# Altium PCB Screen.PcbDoc
Units mm, origin at the board's own origin, x right, y up, seen from the top; angles counter-clockwise.
Board outline 132.7 x 75.8 mm, 2 copper layers (Top Layer, Bottom Layer), stack 1.671 mm thick; 1 components, 0 nets, 46 pads, 0 vias.
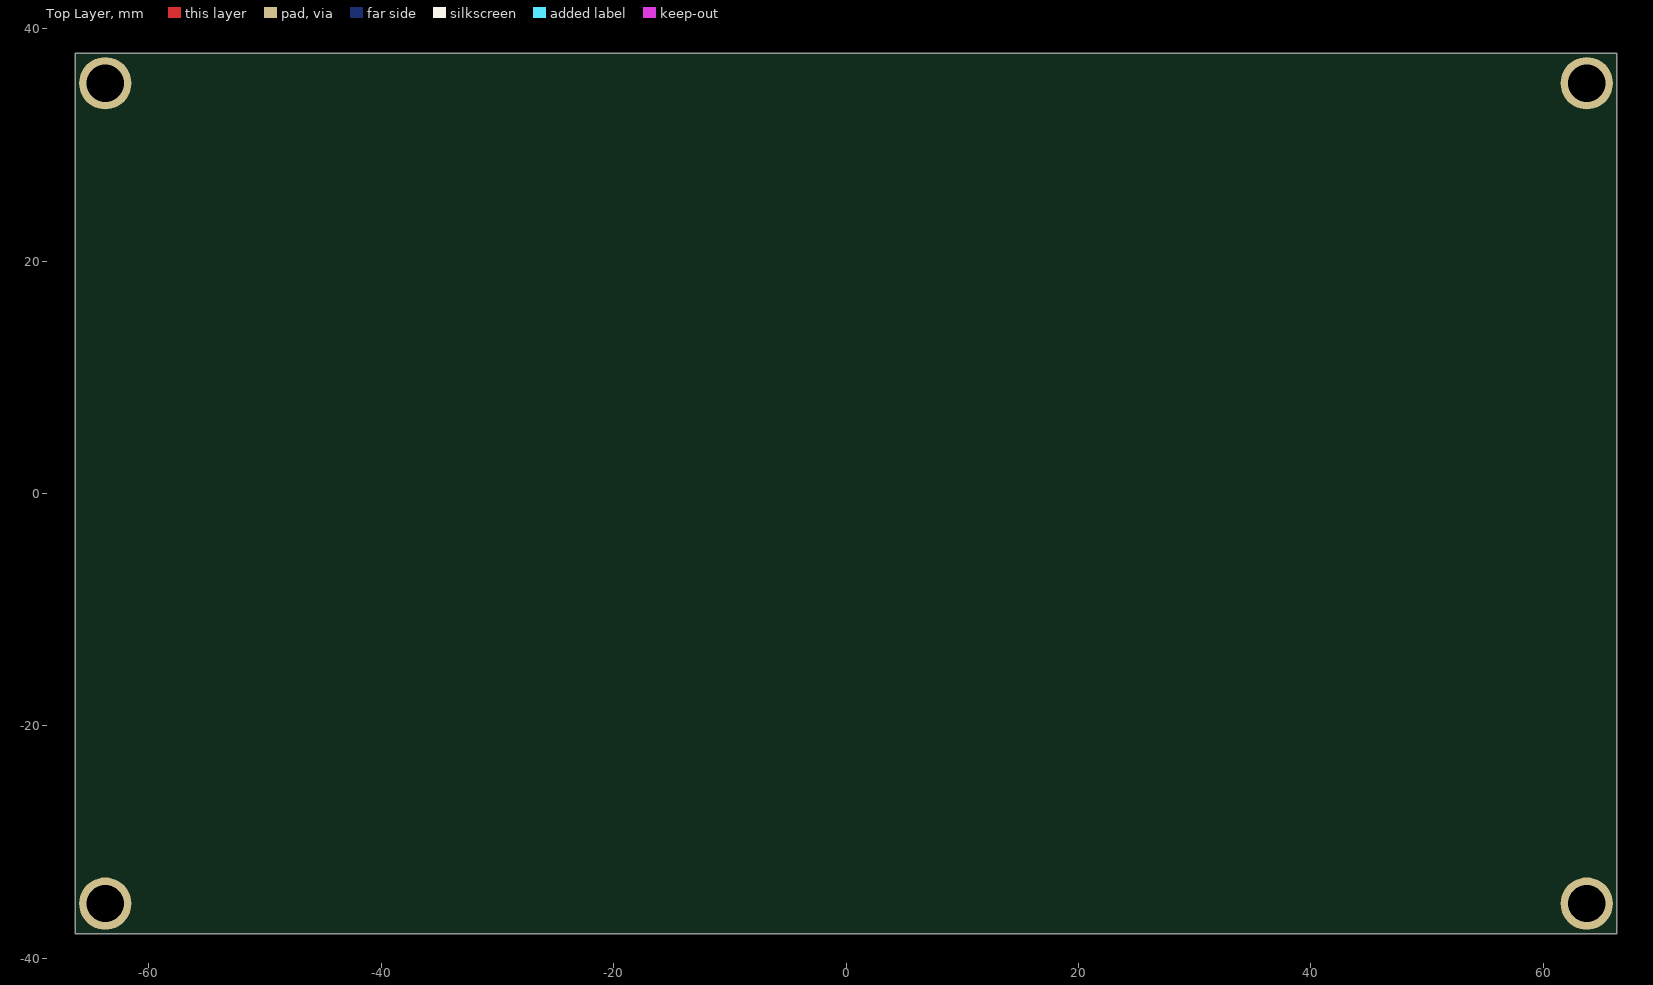
[diagram p0: Top Layer view]
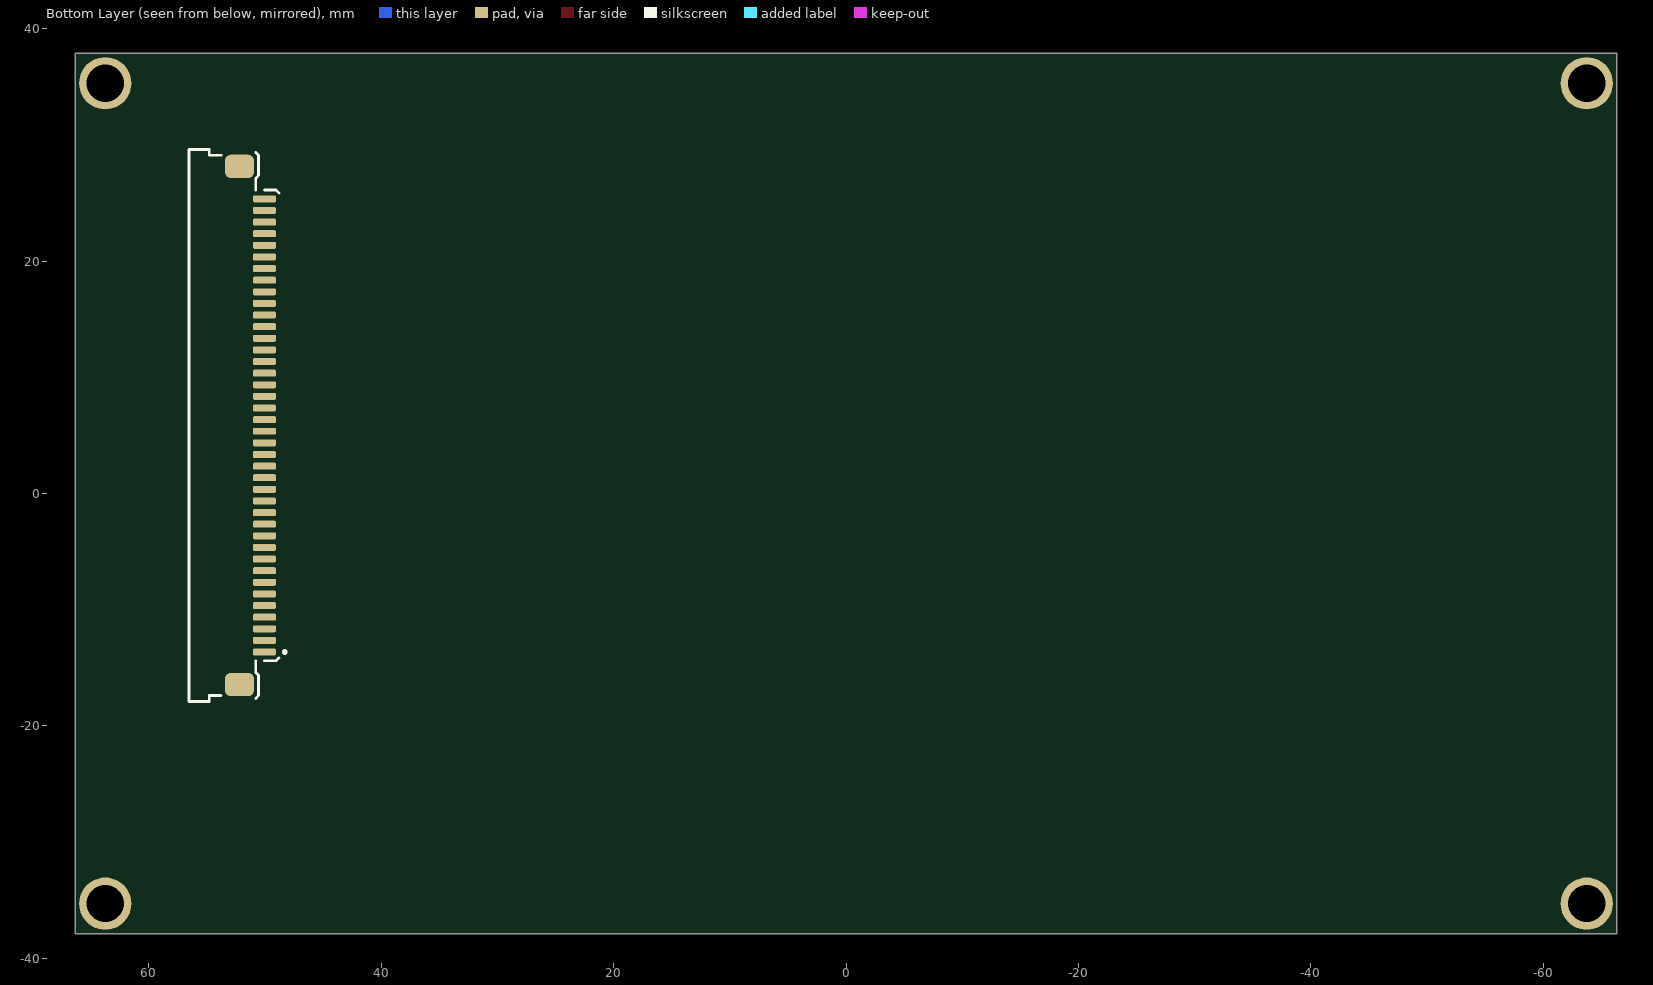
[diagram p1: Bottom Layer view, seen from below]

## Layer stack, top to bottom
Top Solder: solder mask 0.0102, Solder Resist, Dk 3.5
Top Layer: signal copper 0.0356
Dielectric 1: dielectric 1.6, FR-4, Dk 4.8
Bottom Layer: signal copper 0.0356
Bottom Solder: solder mask 0.0102, Solder Resist, Dk 3.5

## Board outline
-66.35,-37.9 66.35,-37.9 66.35,37.9 -66.35,37.9

## Design rules (kind name [scope] priority, off if disabled: settings)
Clearance [All] p1: gap=0.254
ComponentClearance [All] p1: gap=0 collisioncheckmode=3 verticalgap=0 showdistances=FALSE
PolygonConnect [All] p1: connectstyle=Relief reliefconductorwidth=0.254 reliefentries=4 polygonreliefangle="90 Angle" airgapwidth=0.254
RoutingVias [All] p1: holewidth=0.711 width=1.27 viastyle="Through Hole" minholewidth=0.711 minwidth=1.27 maxholewidth=0.711 maxwidth=1.27
SolderMaskExpansion [All] p1: expansion=0.102
Width [All] p1: maxlimit=0.254 minlimit=0.254 preferedwidth=0.254
29 further rules are at their usual default settings.

## Components (designator, comment, footprint, x,y, rotation, side; value= is the part's Value field where it differs from the comment)
? "" ER-CON40HB-2 56.35,5.85 r90 bottom

## Footprints (in the part's own frame and the unit in brackets; to place one, negate y for a bottom-side part, rotate by r counter-clockwise, add the part's x,y. Pads: shape width x height; smd on the part's side, far side on the other; paste and mask are expansions set on the pad)
ER-CON40HB-2 [mm] "Conn - FFC/FPC, 40 Pin, 1.0mm Pitch, ZIF"
  rrect50% 0.6x2 smd: 1(-19.5,-6.3) 2(-18.5,-6.3) 3(-17.5,-6.3) 4(-16.5,-6.3) 5(-15.5,-6.3) 6(-14.5,-6.3) 7(-13.5,-6.3) 8(-12.5,-6.3) 9(-11.5,-6.3) 10(-10.5,-6.3) 11(-9.5,-6.3) 12(-8.5,-6.3) 13(-7.5,-6.3) 14(-6.5,-6.3) 15(-5.5,-6.3) 16(-4.5,-6.3) 17(-3.5,-6.3) 18(-2.5,-6.3) 19(-1.5,-6.3) 20(-0.5,-6.3) 21(0.5,-6.3) 22(1.5,-6.3) 23(2.5,-6.3) 24(3.5,-6.3) 25(4.5,-6.3) 26(5.5,-6.3) 27(6.5,-6.3) 28(7.5,-6.3) 29(8.5,-6.3) 30(9.5,-6.3) 31(10.5,-6.3) 32(11.5,-6.3) 33(12.5,-6.3) 34(13.5,-6.3) 35(14.5,-6.3) 36(15.5,-6.3) 37(16.5,-6.3) 38(17.5,-6.3) 39(18.5,-6.3) 40(19.5,-6.3)
  rrect50% 2x2.5 smd: ""(-22.3,-4.15) ""(22.3,-4.15)
  silkscreen extent -23.75,-8.17 23.75,0.2, body extent -23.5,-6.8 23.5,0, height 2.5

## Free pads (board coordinates)
  round 4.5 hole 3.2: 0(-63.75,-35.3) 0(-63.75,35.3) 0(63.75,-35.3) 0(63.75,35.3)

## Nets (pads, with @x,y where several pads share a name; then routed paths per layer and width w, separated by ;. In a path a pad name is that pad's centre, name@x,y a point inside that pad or via, vN(x,y) a via of type N, cw(c..) or ccw(c..) an arc to the next point about the centre after c; other vN are vias at no path point)
pads on no net: ?. ?.1 ?.2 ?.3 ?.4 ?.5 ?.6 ?.7 ?.8 ?.9 ?.10 ?.11 ?.12 ?.13 ?.14 ?.15 ?.16 ?.17 ?.18 ?.19 ?.20 ?.21 ?.22 ?.23 ?.24 ?.25 ?.26 ?.27 ?.28 ?.29 ?.30 ?.31 ?.32 ?.33 ?.34 ?.35 ?.36 ?.37 ?.38 ?.39 ?.40

## Silkscreen, mask and mechanical layers (free items; w line width, h text height)
Mechanical 1:
  the board outline again, w0.125